# EAGLE board PINO (EAGLE 6.5.0)
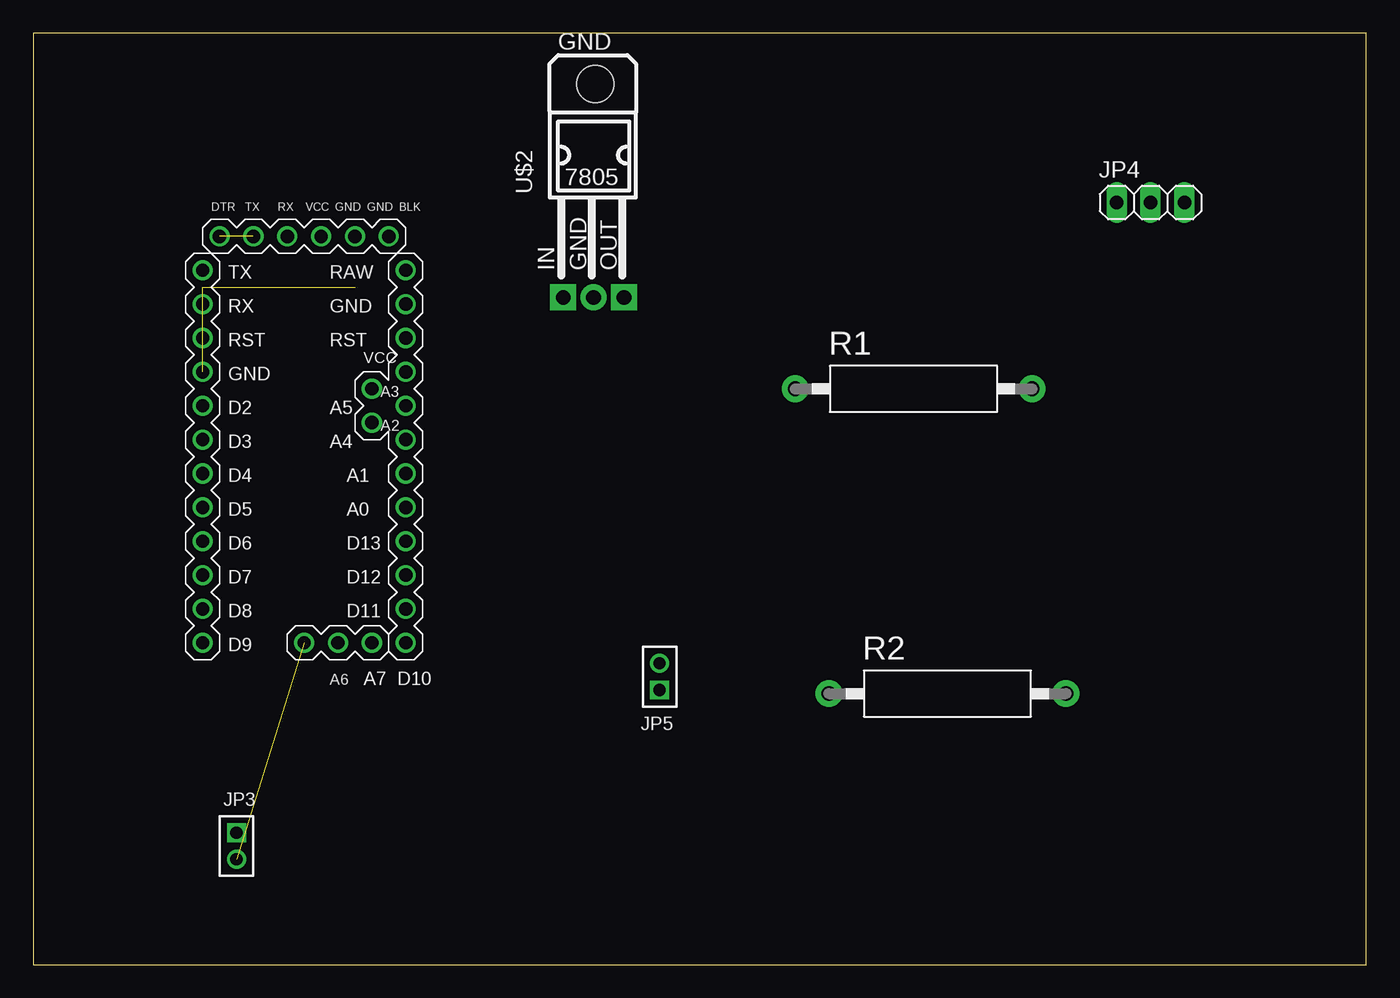
[diagram p0: board, top side]
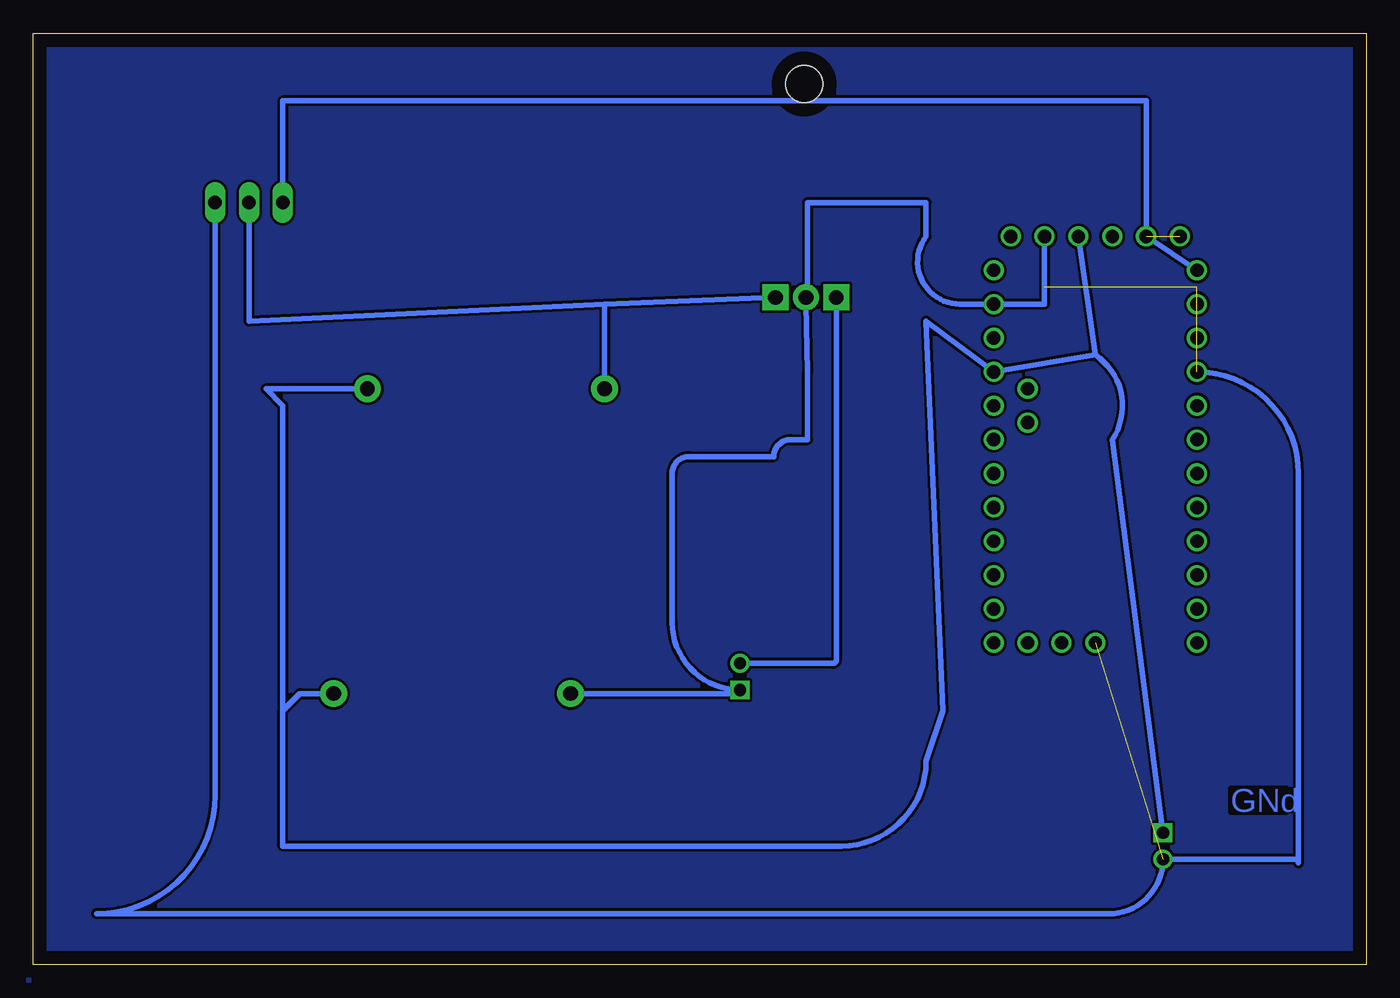
[diagram p1: board, bottom side, seen from below]

Size 100 x 69.84 mm. Coordinates in mm from the lower left corner, seen from the top.
Outline: 0,0 100,0 100,69.84 0,69.84 0,0
Copper layers (1*16): Top 0.035mm / dielectric 1.5mm / Bottom 0.035mm
Design rules "default": minimum track width 10mil, minimum drill 24mil, track to track 8mil, track to pad 8mil, pad to pad 8mil, via to via 8mil, smd to smd 8mil, copper to edge 40mil, drill to drill 8mil, minimum pad ring 10mil, minimum via ring 8mil, stop-mask expansion 4mil, vias tented up to drill 0mil, thermal gap 10mil

## Footprints (pad centres in the part's own frame; a part is rotated, then mirrored left to right if it is on the bottom)
ARDUINO_PRO_MINI = drill 1: A0 11.43,-8.89; A1 11.43,-6.35; A2 11.43,-3.81; A3 11.43,-1.27; A4 8.89,-2.54; A5 8.89,0; A6 6.35,-19.05; A7 8.89,-19.05; BLK 10.16,11.43; D2 -3.81,-1.27; D3 -3.81,-3.81; D4 -3.81,-6.35; D5 -3.81,-8.89; D6 -3.81,-11.43; D7 -3.81,-13.97; D8 -3.81,-16.51; D9 -3.81,-19.05; D10 11.43,-19.05; D11 11.43,-16.51; D12 11.43,-13.97; D13 11.43,-11.43; DTR -2.54,11.43; GND -3.81,1.27; GND@1 11.43,6.35; GND@2 7.62,11.43; GND@3 3.81,-19.05; RAW 11.43,8.89; RST 11.43,3.81; RST@1 -3.81,3.81; RX -3.81,6.35; RX@1 2.54,11.43; TX -3.81,8.89; TX@1 0,11.43; VCC 11.43,1.27; VCC@1 5.08,11.43
1X02M = drill 0.914 square: 1 -1,0 | drill 0.914: 2 1,0
1X03 = drill 1.016 long: 1 -2.54,0; 2 0,0; 3 2.54,0
CA4050 = drill 1.1 pad 2: 1 -8.89,0; 2 8.89,0
L7805 = drill 1.1 pad 1.93: GND 0.127,-9.652 | drill 1.1 pad 1.93 square: IN -2.159,-9.652; OUT 2.413,-9.652 | hole 2.8: 0.254,6.35

## Placement (x,y rotation side)
ARDUINO1  [ARDUINO_PRO_MINI]  16.51,43.18 0 top
JP3  [1X02M]  15.24,8.89 270 top
JP4  [1X03]  83.82,57.15 0 top
JP5  [1X02M]  46.99,21.59 90 top
R1  [CA4050]  66.04,43.18 0 top
R2  [CA4050]  68.58,20.32 0 top
U$2  -L7805  [L7805]  41.91,59.69 0 top

## Library data of the parts
ARDUINO1 = pro
JP3-JP5 = pinhead
R1 R2 = resistor-power; OC_FARNELL: unknown; OC_NEWARK: unknown
U$2 = tango (1)

## Nets
N$1: JP5.2 U$2.IN
N$2: ARDUINO1.GND ARDUINO1.GND@1 ARDUINO1.GND@2 ARDUINO1.GND@3 JP3.2 JP4.3 JP5.1 R2.1 U$2.GND
N$4: ARDUINO1.DTR ARDUINO1.TX ARDUINO1.TX@1 JP4.1
N$5: ARDUINO1.VCC ARDUINO1.VCC@1 JP3.1 R1.2 R2.2
N$7: JP4.2 R1.1 U$2.OUT

## Tracks (layer width: path | path; a pad name or v marks a point on that pad's centre or on a via)
GND
  pour Bottom: 0,69.85 100.33,69.85 100.33,66.04 100.33,-1.27 100.33,0 0,0 0,2.54
N$1
  Bottom 0.406: U$2.IN 39.75,22.86 arc90 40.02,22.59 JP5.2
N$2  (4 unrouted)
  Bottom 0.406: U$2.GND 42.02,49.53 | 42.02,49.53 41.91,44.45 41.91,39.37 43.18,39.37 arc-90 44.45,38.1 50.8,38.1 arc-90 52.07,36.83 52.07,25.67 arc-90 JP5.1 arc90 47.26,20.32 R2.1 | ARDUINO1.GND arc90 5.08,36.83 5.08,7.62 arc-90 5.35,7.89 JP3.2 arc90 19.32,3.81 95.25,3.81 arc-90 86.36,12.7 JP4.3 | 42.02,49.53 41.91,49.53 41.91,57.15 33.02,57.15 33.02,54.61 arc-127 30.48,49.53 ARDUINO1.GND@1 24.13,49.53 ARDUINO1.GND@2
N$4  (1 unrouted)
  Bottom 0.406: ARDUINO1.TX ARDUINO1.TX@1 16.51,64.77 81.28,64.77 JP4.1
N$5
  Bottom 0.406: ARDUINO1.VCC@1 20.32,45.72 | 20.32,45.72 ARDUINO1.VCC 33.02,48.26 31.75,19.05 33.02,15.24 arc90 39.37,8.89 81.28,8.89 81.28,19.05 | R1.2 82.55,43.18 81.28,41.91 81.28,19.05 | 81.28,19.05 80.01,20.32 R2.2 | 20.32,45.72 arc90 19.05,39.37 JP3.1
N$7
  Bottom 0.406: U$2.OUT 57.15,49.53 | 57.15,49.53 R1.1 | 57.15,49.53 83.82,48.26 JP4.2

## Text on the board
Bottom: GNd